# Altium PCB Node_STM32.PcbDoc
Units mil, origin at the board's own origin, x right, y up, seen from the top; angles counter-clockwise.
Board outline 3035 x 3595 mil, 2 copper layers (Top Layer, Bottom Layer); 15 components, 20 nets, 111 pads, 0 vias.
Unrouted connection lines stored in the file: 1.
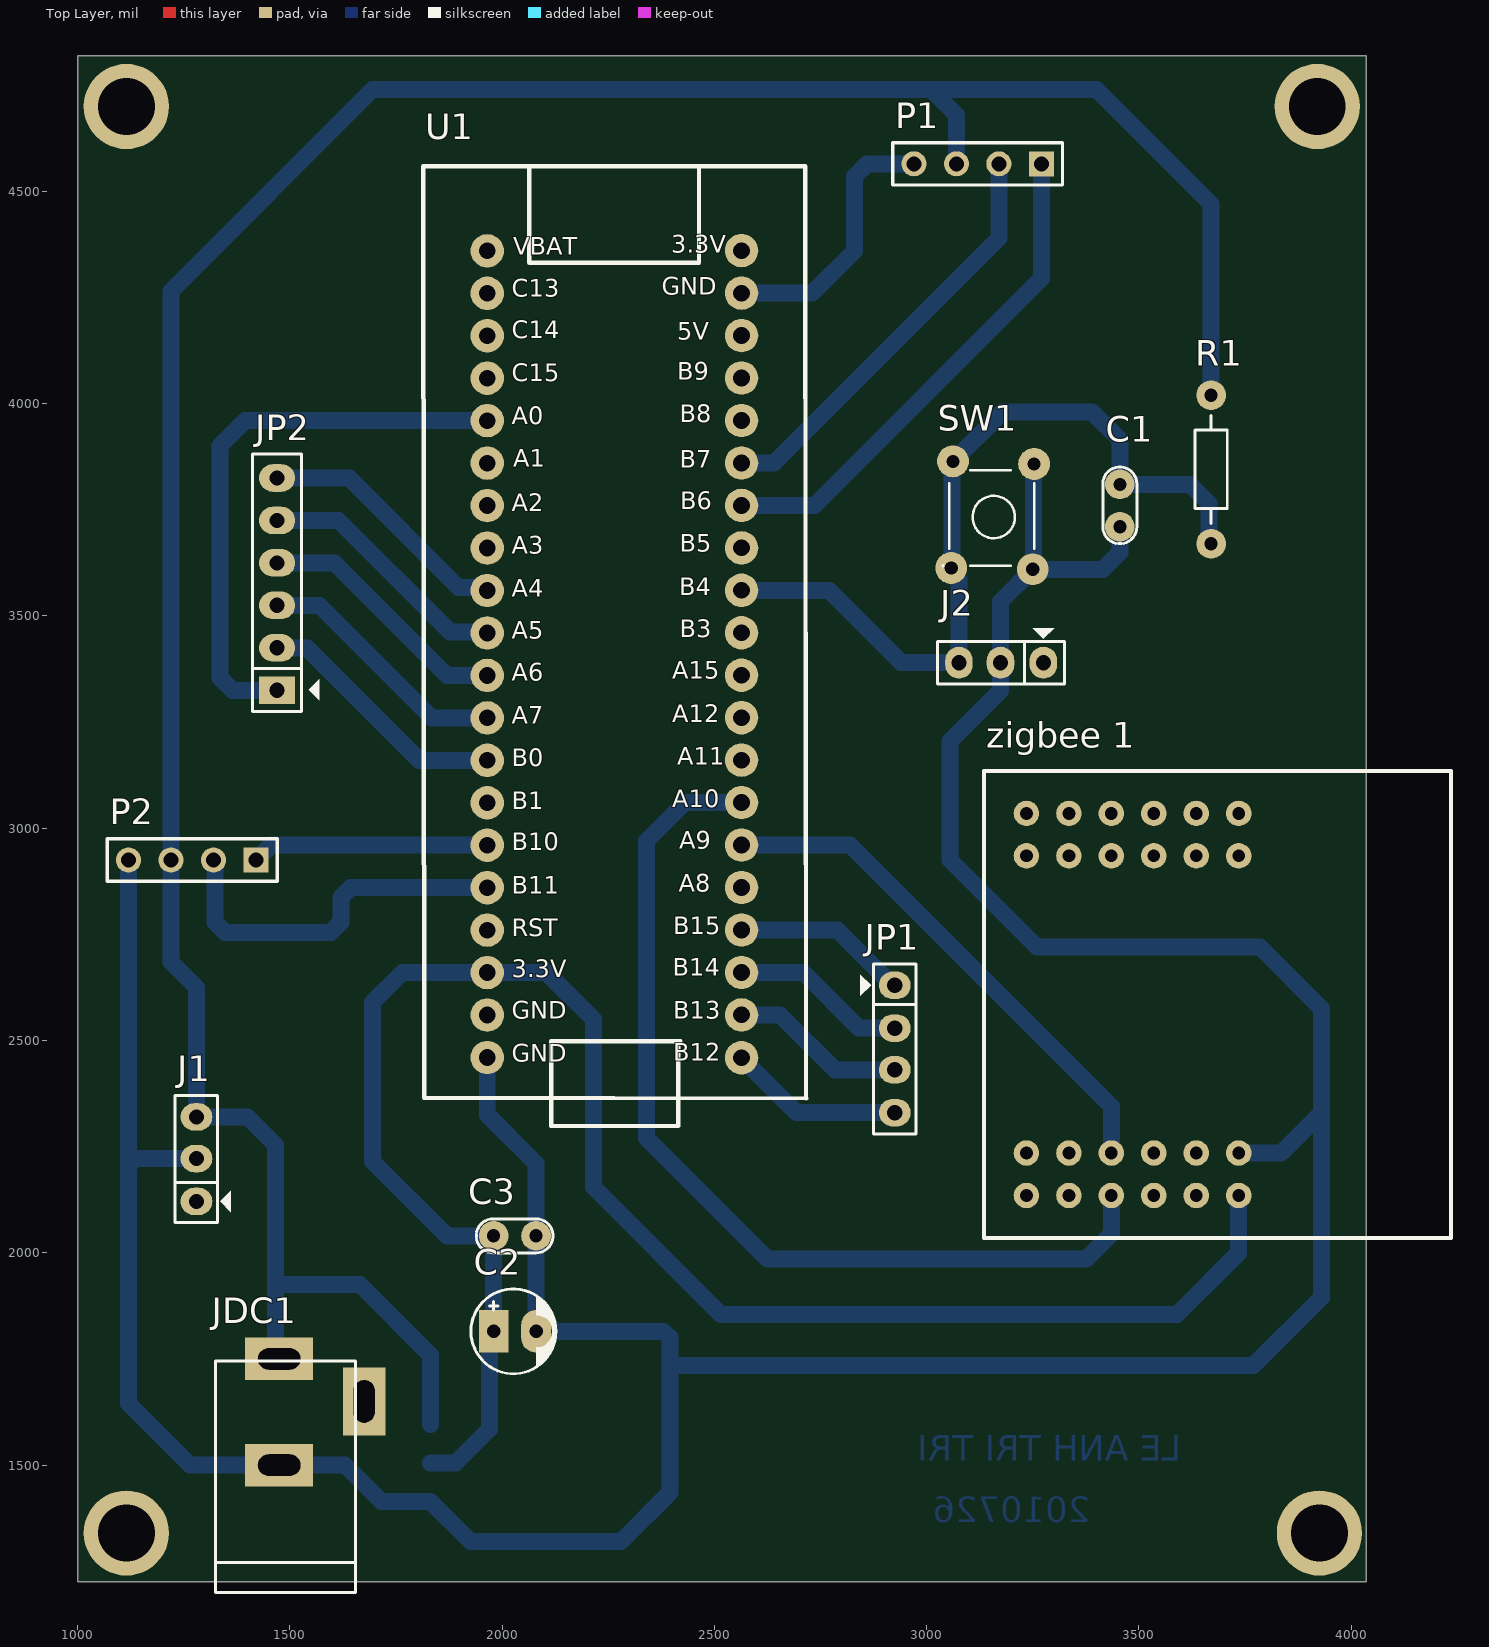
[diagram p0: Top Layer view]
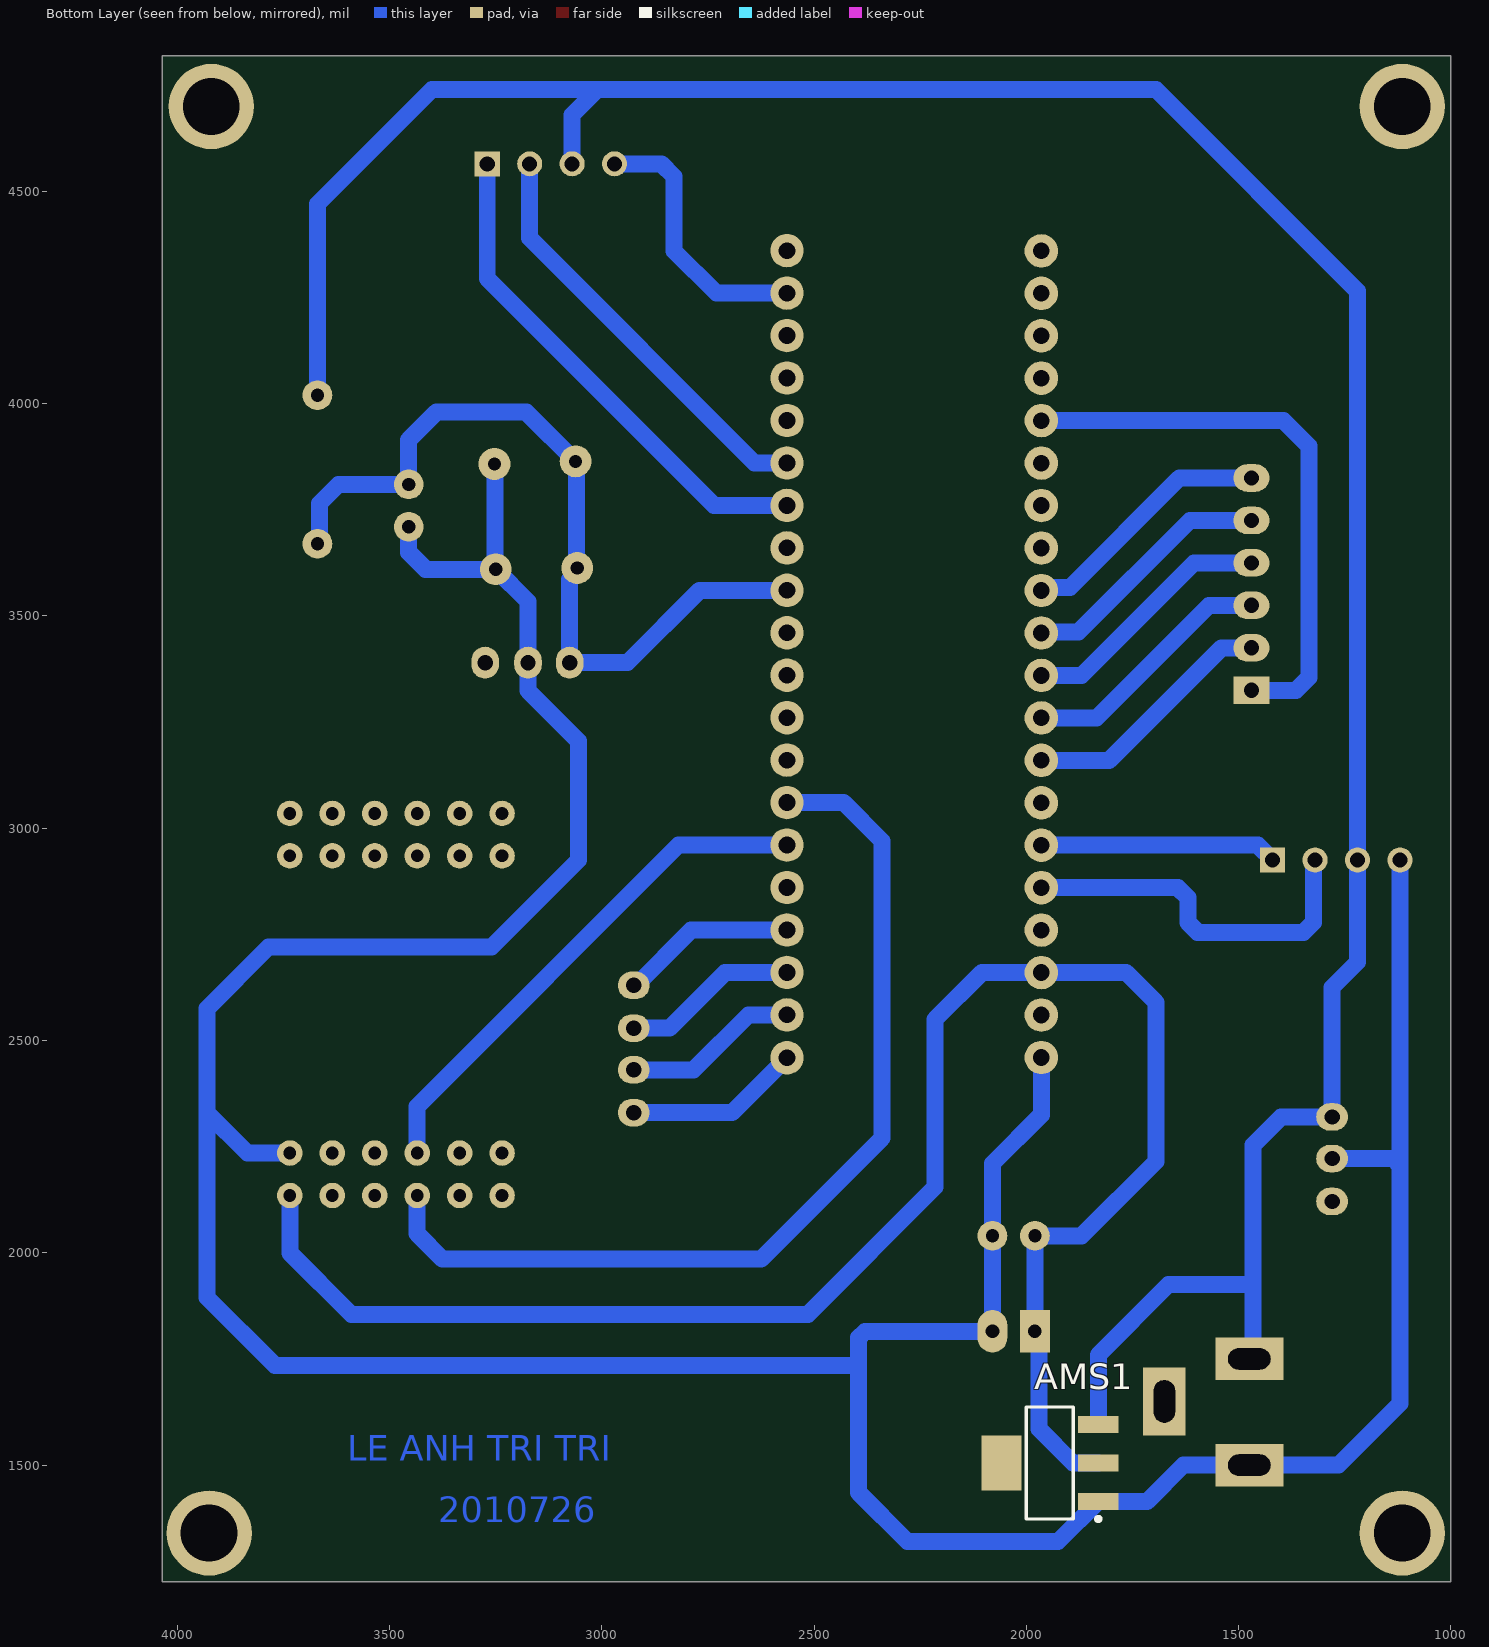
[diagram p1: Bottom Layer view, seen from below]
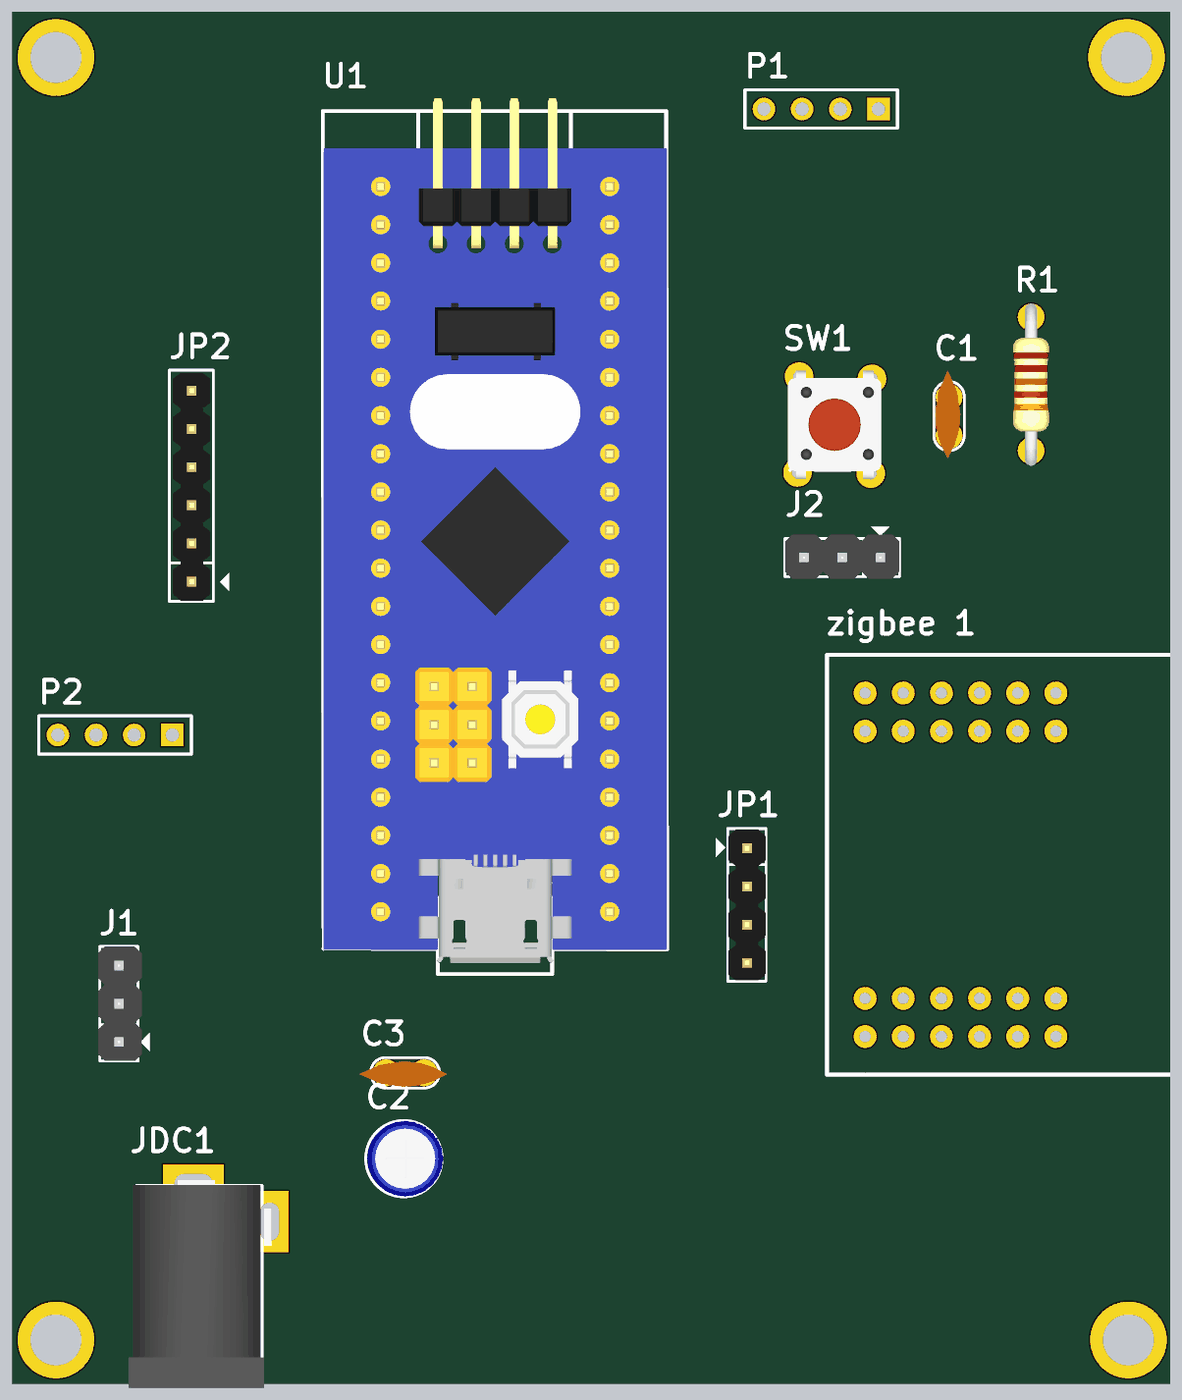
[diagram p2: 3D render of the assembled board from above, using the file's embedded part models]

## Layer stack, top to bottom
Top Solder: solder mask 0.4, Solder Resist, Dk 3.5
Top Layer: signal copper 1.4
Dielectric 1: dielectric 12.6, FR-4, Dk 4.8
Bottom Layer: signal copper 1.4
Bottom Solder: solder mask 0.4, Solder Resist, Dk 3.5

## Board outline
1000,1225 4035,1225 4035,4820 1000,4820

## Design rules (kind name [scope] priority, off if disabled: settings)
Clearance [All] p1: gap=20 ignorepadtopadclearanceinfootprint=FALSE
PolygonConnect [All] p1: connectstyle=Relief reliefconductorwidth=10 reliefentries=4 polygonreliefangle="90 Angle" airgapwidth=10
RoutingVias [All] p1: holewidth=28 width=50 viastyle="Through Hole" minholewidth=28 minwidth=50 maxholewidth=28 maxwidth=50
SolderMaskExpansion [All] p1: expansion=4 istentingtop=FALSE
Width [All] p1: maxlimit=100 minlimit=40 preferedwidth=40
30 further rules are at their usual default settings.

## Components (designator, comment, footprint, x,y, rotation, side; value= is the part's Value field where it differs from the comment)
AMS1 "LM1117" SOT223-4N 1945,1505 r0 bottom value=LM317
C1 "100nF" CN1 3455,3710 r90 top value=33pF
C2 "10uF" CP1/2 1980,1815 r0 top value=10uF/50V
C3 "100nF" CN1 2080,2040 r180 top value=33pF
J1 "Jumper 3" JP3 1280,2221 r90 top value=J3
J2 "Jumper 3" JP3 3175,3390 r180 top value=J3
JDC1 "Jac DC" DC-IN 1575,1625 r90 top
JP1 "JP4 PIN" JP4 2925,2530 r270 top value=JP4
JP2 "JP6 PIN" JP6 1470,3325 r90 top value=JP7
P1 "*Header" HDR1X4 3270,4565 r180 top
P2 "*Header" HDR1X4 1420,2925 r180 top
R1 "10k" R1/4W 3670,3670 r90 top value="R1/4W - 1K"
SW1 "SW" SW4 3253,3858 r270 top value="Button chip 4 pin"
U1 "STM32" STM32 2264.5,3409.93 r0 top
"zigbee 1" "zigbee_esp" zigbee 3735,2135 r180 top

## Footprints (in the part's own frame and the unit in brackets; to place one, negate y for a bottom-side part, rotate by r counter-clockwise, add the part's x,y. Pads: shape width x height; smd on the part's side, far side on the other; paste and mask are expansions set on the pad)
CN1 [mil]
  round 70 hole 31: 1(0,0) 2(100,0)
  silkscreen extent -40,-40 141,40, body extent -60,-30 170,37, height 265
CP1/2 [mil] "Tu hoa < 22uF/16>50V"
  rect 70x100 hole 32: 1(0,0)
  oval 70x100 hole 32: 2(100,0)
  silkscreen extent -53,-100 147,100, body extent -49,-99 149,99, height 287
DC-IN [mil] "Jac DC input"
  rect 100x160 hole 50 slot 100 at 90 deg: 1(125,100) 2(-125,100)
  rect 160x100 hole 50 slot 100 at 0 deg: 3(25,-100)
  silkscreen extent -425,-80 120,250, body extent -410,-105 134,269, height 434
HDR1X4 [mm] "Connector; Header; 4 Position"
  rect 1.5x1.5 hole 0.9: 1(0,0)
  round 1.5 hole 0.9: 2(2.54,0) 3(5.08,0) 4(7.62,0)
  silkscreen extent -1.27,-1.27 8.89,1.27, body extent -1.27,-1.27 8.89,1.27, height 7
JP3 [mil] "Jumper 3"
  oval 65x75 hole 36: 1(-100,0) 2(1,0) 3(99,0)
  silkscreen extent -150,-81 150,50, body extent -150,-60 150,55, height 355
JP4 [mil] "Jumper 4"
  oval 65x75 hole 36: 1(-100,0) 2(1,0) 3(99,0) 4(200,0)
  silkscreen extent -150,-81 250,50, body extent -148,-48 248,50, height 323
JP6 [mil] "JP6"
  rect 65x85 hole 36: 1(0,0)
  oval 65x85 hole 36: 2(100,0) 3(200,0) 4(300,0) 5(400,0) 6(500,0)
  silkscreen extent -50,-99 556,58, body extent -48,-50 548,48, height 323
R1/4W [mil] "R 1/4W, 2 Pin, 350mil"
  round 70 hole 31: 1(0,0) 2(350,0)
  silkscreen extent 48,-38 302,38, body extent -40,-47 386,47, height 111
SOT223-4N [mm] "SOT223, 4-Leads, Body 6.5x3.5mm, Pitch 2.3mm, Lead Span 7mm, IPC Medium Density"
  rect 2.4x1 smd: 1(-2.9,2.3) 2(-2.9,0) 3(-2.9,-2.3)
  rect 2.4x3.3 smd: 4(2.9,0)
  silkscreen extent -3.02,-3.35 1.4,3.47, body extent -3.39,-3.27 3.5,3.23, height 1.72
STM32 [mm]
  round 2 hole 1: 1(7.607,-24.143) 2(7.607,-21.577) 3(7.607,-19.037) 4(7.607,-16.497) 5(7.607,-13.957) 6(7.607,-11.417) 7(7.607,-8.877) 8(7.607,-6.337) 9(7.607,-3.797) 10(7.607,-1.257) 11(7.607,1.283) 12(7.607,3.823) 13(7.607,6.363) 14(7.607,8.903) 15(7.607,11.443) 16(7.607,13.983) 17(7.607,16.523) 18(7.607,19.063) 19(7.607,21.603) 20(7.607,24.143) 21(-7.607,24.132) 22(-7.607,21.592) 23(-7.607,19.052) 24(-7.607,16.512) 25(-7.607,13.972) 26(-7.607,11.432) 27(-7.607,8.892) 28(-7.607,6.352) 29(-7.607,3.812) 30(-7.607,1.272) 31(-7.607,-1.268) 32(-7.607,-3.808) 33(-7.607,-6.348) 34(-7.607,-8.888) 35(-7.607,-11.428) 36(-7.607,-13.968) 37(-7.607,-16.508) 38(-7.607,-19.048) 39(-7.607,-21.588) 40(-7.607,-24.128)
  silkscreen extent -11.44,-28.23 11.47,29.2, body extent -11.4,-27.51 11.46,30.05, height 12.31
SW4 [mil] "SW button 4pin, 250 x250 mil"
  round 75 hole 31: 1(0,0) 2(245,-195) 3(248,-3) 4(-6,-191)
  silkscreen extent 15,-215 240,0, body extent -36,-220 276,24, height 276
zigbee [mil]
  round 60 hole 30: 1(500,0) 2(400,0) 3(300,0) 4(200,0) 5(100,0) 6(0,0) 7(0,-100) 8(100,-100) 9(200,-100) 10(300,-100) 11(400,-100) 12(500,-100) 13(500,-800) 14(400,-800) 15(300,-800) 16(200,-800) 17(100,-800) 18(0,-800) 19(0,-900) 20(100,-900) 21(200,-900) 22(300,-900) 23(400,-900) 24(500,-900)
  silkscreen extent -500,-1000 600,100

## Part data
AMS1: "Available in 1.8V, 2.5V, 2.85V, 3.3V, 5V, and  Adjustable Versions"
C1 C3: library part CN0, "Cremic For Xtal 1pF => 100pF"
C2: library part CP1, "Cap P  0,1uF < 22uF , 16 - 50V", Description 1="10 => 220uF/6,3V/10V - 10uF => 100uF/16V", Description 2="0,1uF => 33uF/50V - 10uF => 22uF/63V", Description 3="0,47uF => 10uF/100V"
J1 J2: library part JP3
JDC1: library part DCIN, "Jac DC input"
JP1: library part JP4
JP2: library part JP6
P1 P2: library part "Header 4", "Header, 4-Pin, Right Angle", LatestRevisionDate=17-Jul-2002, LatestRevisionNote="Re-released for DXP Platform.", Publisher="Altium Limited"
R1: library part R1/4W, "Resistor 1/4W"
SW1: library part SW4, "Switch button 4 pin"

## Free pads (board coordinates)
  round 200.79 hole 133.86: 2(1115,1340) 2(1115,4700) 2(3920,4700) 2(3925,1340)

## Nets (pads, with @x,y where several pads share a name; then routed paths per layer and width w, separated by ;. In a path a pad name is that pad's centre, name@x,y a point inside that pad or via, vN(x,y) a via of type N, cw(c..) or ccw(c..) an arc to the next point about the centre after c; other vN are vias at no path point)
BUTTON: C1.2 J2.3 R1.1 SW1.2 SW1.4 U1.12 | length 1964.4
  Bottom Layer w40: U1.12 2769.57,3560.43 2940,3390 J2.3 3076,3585.53 3058,3603.53 SW1.2 3060,3615 3060,3862 3178,3980 3390,3980 3455,3915 C1.2 3620,3810 3665,3765 3665,3675 R1.1
CS1: JP2.6 U1.29 | length 604.8
  Bottom Layer w40: JP2.6 1640,3825 1897.59,3567.41 1957.59,3567.41 U1.29
GND: "zigbee 1.7" AMS1.1 C1.1 C2.2 C3.1 J1.2 J2.2 JDC1.2 P1.4 P2.4 SW1.1 SW1.3 U1.19 U1.40 | length 9750
  Bottom Layer w40: P2.4 1120,2205 ; J1.2 1137,2222 1120,2205 ; U1.40 1965,2325 2080,2210 C3.1 C2.2 2380,1815 2395,1800 2395,1735 ; U1.19 2730.43,4260.43 2830,4360 2830,4535 2860,4565 P1.4 ; SW1.1 3251.5,3856.5 3251.5,3611.5 SW1.3 ; C1.1 3455,3650 3415,3610 SW1.3 ; 3735,2235 3835,2235 3930,2330 ; 1120,2205 1120,1645 1265,1500 JDC1.2 1630,1500 1715.55,1414.45 AMS1.1 1925.27,1320 2280,1320 2395,1435 2395,1735 ; 2395,1735 3770,1735 3930,1895 3930,2330 ; SW1.3 3174,3534 3174,3324 3055,3205 3055,2925 3260,2720 3785,2720 3930,2575 3930,2330
MISO1: JP2.4 U1.31 | length 604.8
  Bottom Layer w40: JP2.4 1605,3625 1870,3360 U1.31
MOSI1: JP2.3 U1.32 | length 604.8
  Bottom Layer w40: JP2.3 1570,3525 1835,3260 U1.32
NetJP1_1: JP1.1 U1.4 | length 415
  Bottom Layer w40: U1.4 2789.57,2760.43 2920,2630 JP1.1
NetJP1_2: JP1.2 U1.3 | length 415.4
  Bottom Layer w40: U1.3 2709.57,2660.43 2841,2529 JP1.2
NetJP1_3: JP1.3 U1.2 | length 414.6
  Bottom Layer w40: U1.2 2654.57,2560.43 2784,2431 JP1.3
NetJP1_4: JP1.4 U1.1 | length 414.6
  Bottom Layer w40: U1.1 2693.43,2330 JP1.4
RELAY: JP2.1 U1.25 | length 1347.3
  Bottom Layer w40: JP2.1 1365,3325 1335,3355 1335,3900 1395,3960 U1.25
RESET1: JP2.2 U1.33 | length 604.8
  Bottom Layer w40: JP2.2 1540,3425 1805,3160 U1.33
RX: "zigbee 1.10" U1.6 | length 1235.9
  Bottom Layer w40: U1.6 2819.57,2960.43 3435,2345 3435,2235
SCK1: JP2.5 U1.30 | length 604.8
  Bottom Layer w40: JP2.5 1615,3725 1877.23,3462.77 1962.23,3462.77 U1.30
SCL1: P1.1 U1.14 | length 1197.4
  Bottom Layer w40: U1.14 2735.43,3760.43 3270,4295 P1.1
SCL2: P2.1 U1.35 | length 559.5
  Bottom Layer w40: P2.1 1455,2960 U1.35
SDA1: P1.2 U1.15 | length 1000.4
  Bottom Layer w40: U1.15 2640.43,3860.43 3170,4390 P1.2
SDA2: P2.2 U1.36 | length 876.7
  Bottom Layer w40: P2.2 1323.65,2921.35 1323.65,2778.43 1347.08,2755 1596.57,2755 1620,2778.43 1620,2836.57 1643.43,2860 U1.36
TX: "zigbee 1.3" U1.7 | length 2289.4
  Bottom Layer w40: U1.7 2430.43,3060.43 2340,2970 2340,2270 2625,1985 3375,1985 3435,2045 3435,2135
VCC: AMS1.3 J1.3 JDC1.1 P1.3 P2.3 R1.2 | length 6696.6
  Bottom Layer w40: JDC1.1 1465.88,1759.12 1465.88,1925 ; AMS1.3 1830.83,1759.17 1665,1925 1465.88,1925 ; P1.3 3070,4680 3010,4740 ; R1.2 3670,4470 3400,4740 3010,4740 ; 1465.88,1925 1465.88,2254.12 1400,2320 J1.3 1280,2625 1220,2685 P2.3 1220,4265 1695,4740 3010,4740
VCC3V3: "zigbee 1.6" AMS1.2 C2.1 C3.2 U1.38 | length 4192.8
  Bottom Layer w40: AMS1.2 1890,1505 1970,1585 1970,1805 C2.1 C3.2 1870,2040 1695,2215 1695,2590 1765,2660 U1.38 1965.27,2659.73 2105.27,2659.73 2215,2550 2215,2155 2515,1855 3590,1855 3735,2000 3735,2135
pads on no net: "zigbee 1.1" "zigbee 1.2" "zigbee 1.4" "zigbee 1.5" "zigbee 1.8" "zigbee 1.9" "zigbee 1.11" "zigbee 1.12" "zigbee 1.13" "zigbee 1.14" "zigbee 1.15" "zigbee 1.16" "zigbee 1.17" "zigbee 1.18" "zigbee 1.19" "zigbee 1.20" "zigbee 1.21" "zigbee 1.22" "zigbee 1.23" "zigbee 1.24" AMS1.4 J1.1 J2.1 JDC1.3 U1.5 U1.8 U1.9 U1.10 U1.11 U1.13 U1.16 U1.17 U1.18 U1.20 U1.21 U1.22 U1.23 U1.24 U1.26 U1.27 U1.28 U1.34 U1.37 U1.39

## Other copper
Bottom Layer:
  text "LE ANH TRI TRI" at 3600,1510 h60
  text "2010726" at 3385,1365 h60

## Text inside footprints (layer, text, board x,y; h text height)
U1: Top Overlay "B12" at 2403.4,2437.93 h70; Top Overlay "GND" at 2023,2435.7 h70; Top Overlay "B13" at 2403,2536.7 h70; Top Overlay "GND" at 2023,2536.7 h70; Top Overlay "A1" at 2025.8,3836.93 h70; Top Overlay "A0" at 2023,3937.7 h70; Top Overlay "C14" at 2023,4139.7 h70; Top Overlay "C13" at 2023,4237.7 h70; Top Overlay "C15" at 2023,4038.7 h70; Top Overlay "B6" at 2419.2,3737.7 h70; Top Overlay "B4" at 2416.7,3534.93 h70; Top Overlay "B7" at 2418,3834.93 h70; Top Overlay "B14" at 2402.2,2637.93 h70; Top Overlay "B5" at 2418,3636.7 h70; Top Overlay "VBAT" at 2025.86,4336.93 h70; Top Overlay "A10" at 2400.9,3035.7 h70; Top Overlay "A12" at 2400.9,3235.93 h70; Top Overlay "A15" at 2400.9,3337.7 h70; Top Overlay "A9" at 2416.7,2937.7 h70; Top Overlay "B3" at 2418,3435.7 h70; Top Overlay "A11" at 2412.2,3134.93 h70; Top Overlay "A8" at 2415.5,2836.7 h70; Top Overlay "B15" at 2403.4,2735.7 h70; Top Overlay "3.3V" at 2023,2634.7 h70; Top Overlay "B1" at 2023,3030.93 h70; Top Overlay "B0" at 2023,3131.7 h70; Top Overlay "A7" at 2023,3231.93 h70; Top Overlay "A6" at 2023,3333.7 h70; Top Overlay "B11" at 2023,2831.93 h70; Top Overlay "B10" at 2023,2933.7 h70; Top Overlay "RST" at 2023,2731.7 h70; Top Overlay "A4" at 2023,3530.93 h70; Top Overlay "A3" at 2023,3632.7 h70; Top Overlay "A2" at 2023,3732.93 h70; Top Overlay "A5" at 2023,3431.7 h70; Top Overlay "GND" at 2375.8,4242.7 h70; Top Overlay "3.3V" at 2398,4341.7 h70; Top Overlay "B8" at 2418,3941.7 h70; Top Overlay "B9" at 2413,4041.7 h70; Top Overlay "5V" at 2413,4136.7 h70